# Altium PCB ip-mic-cat.PcbDoc (part 1 of 2)
Units mm, origin at the board's own origin, x right, y up, seen from the top; angles counter-clockwise.
Board outline 152.4 x 101.6 mm, 2 copper layers (Top Layer, Bottom Layer); 79 components, 63 nets, 296 pads, 99 vias.
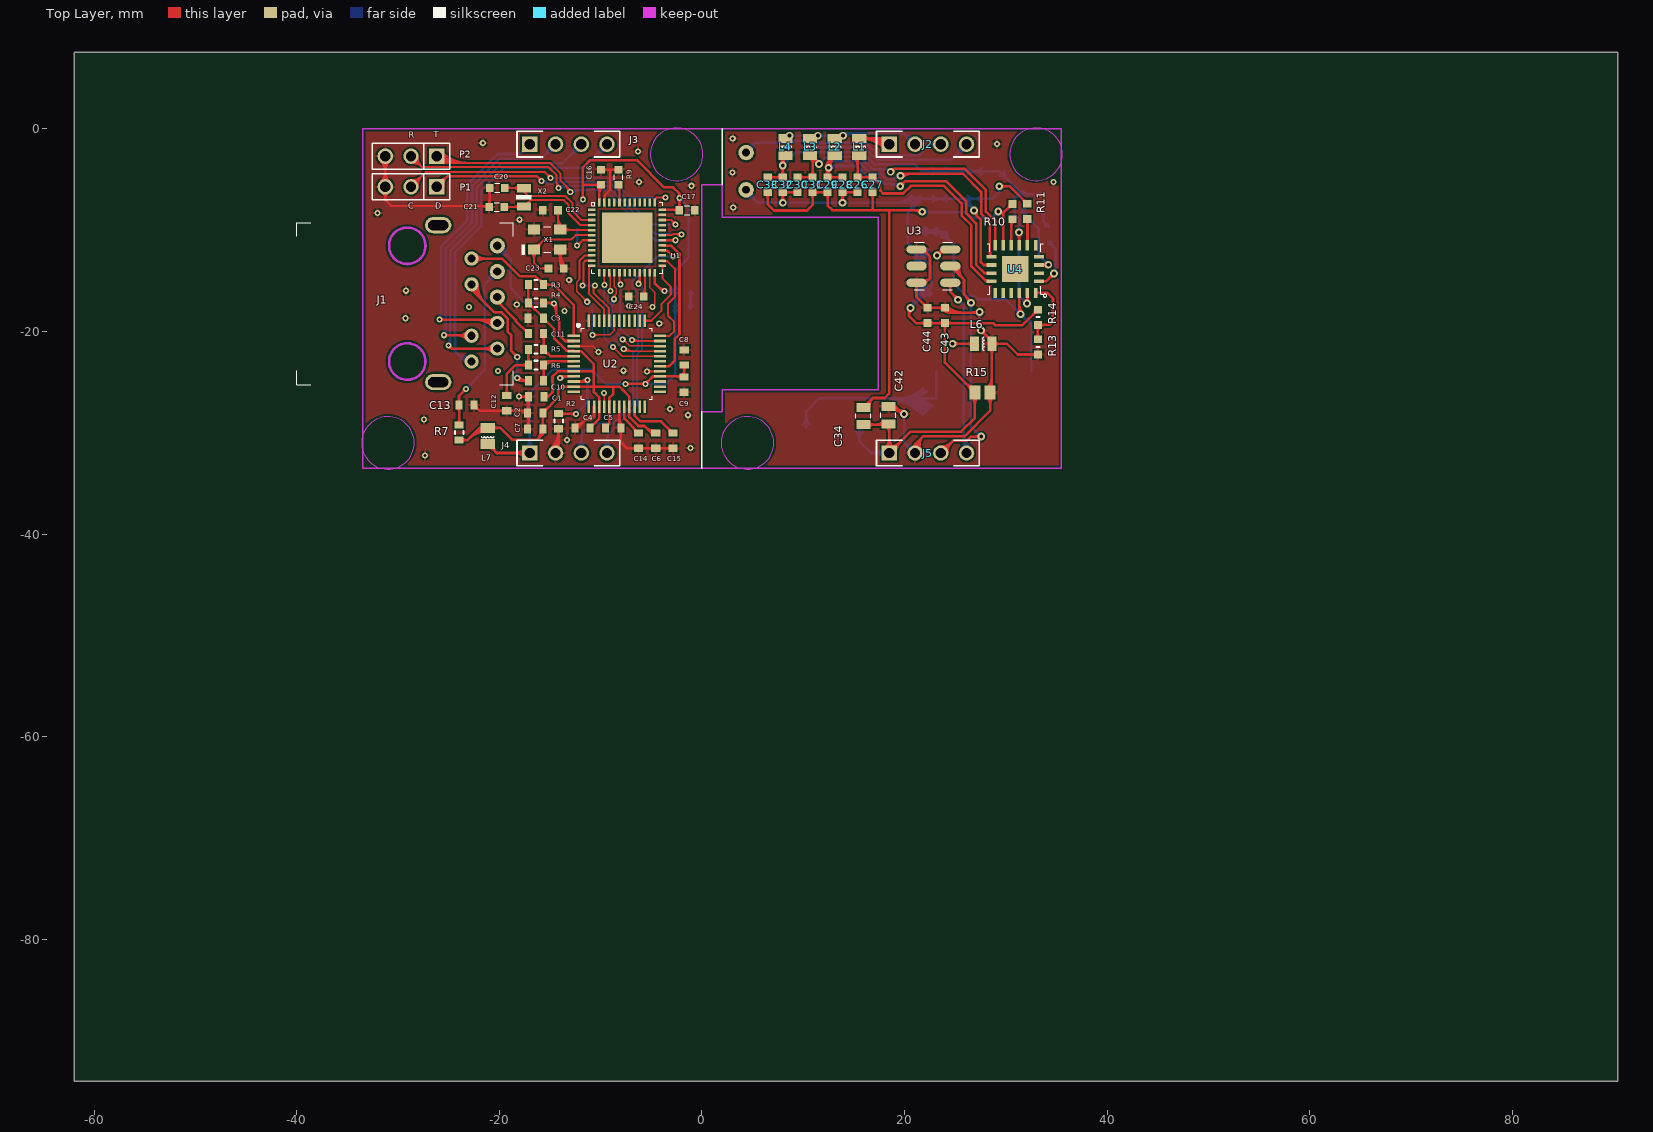
[diagram p0: Top Layer view]
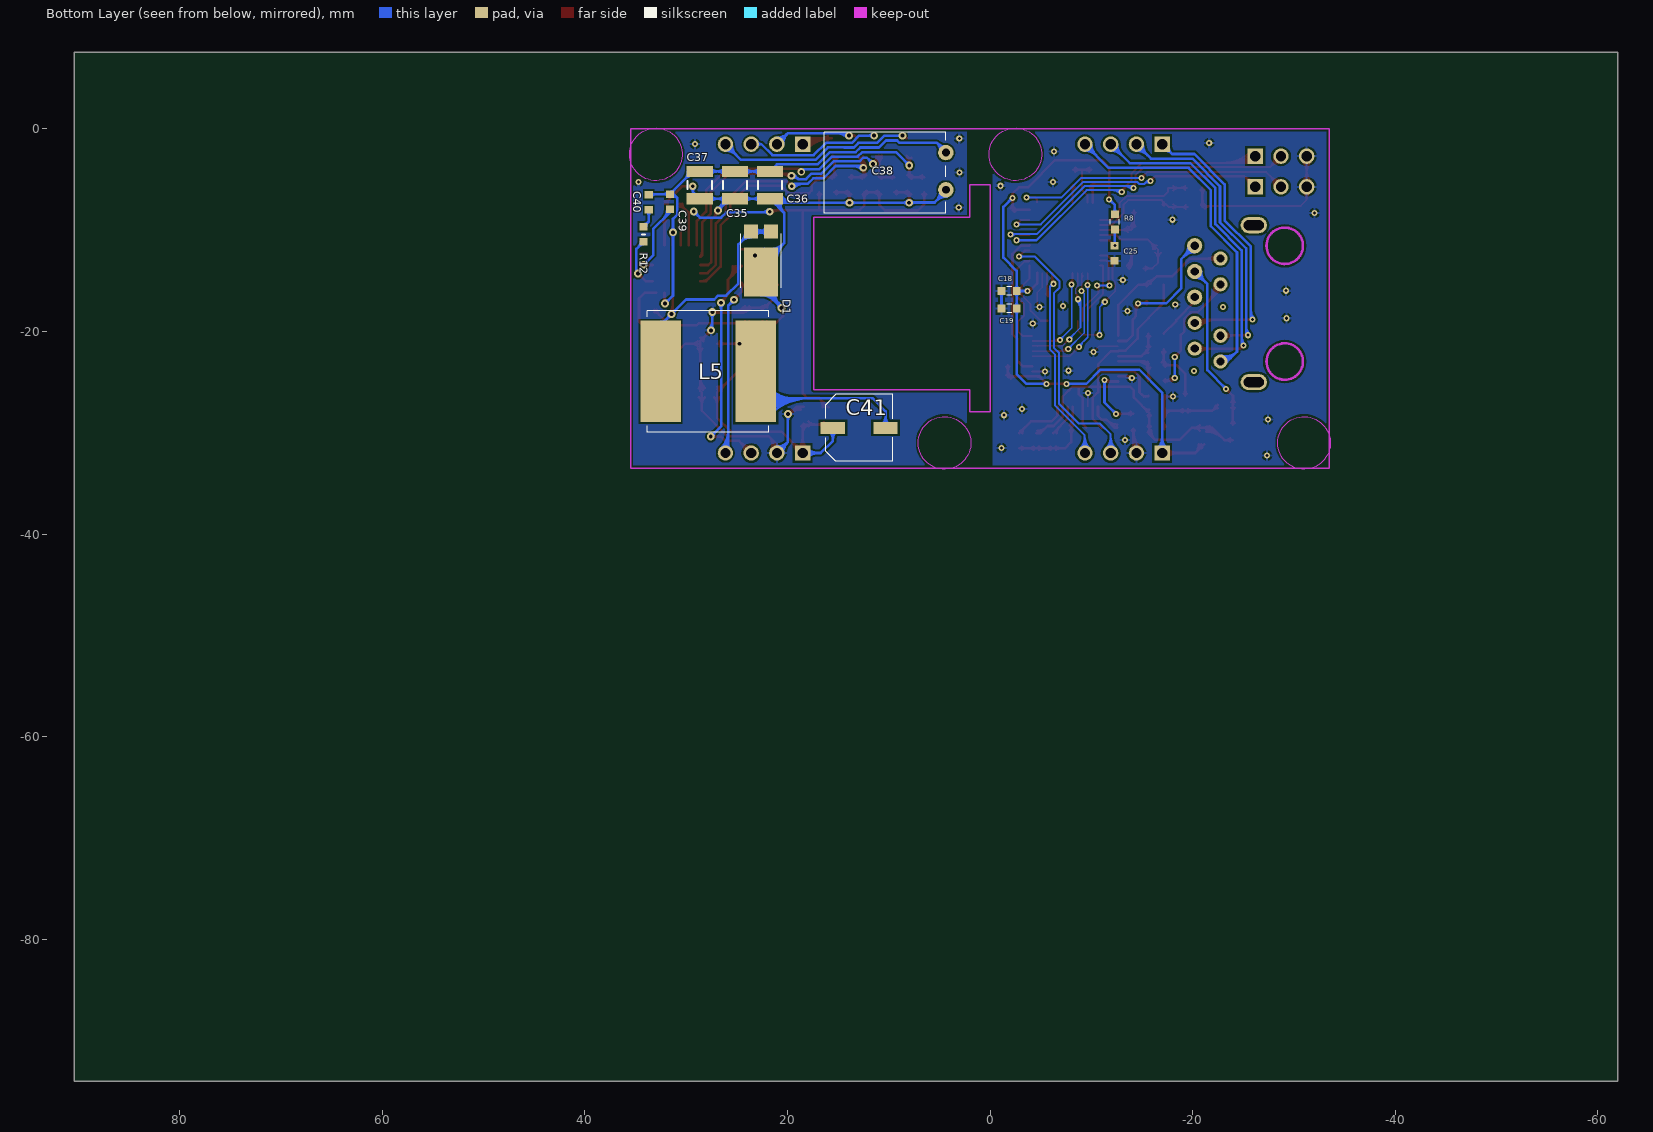
[diagram p1: Bottom Layer view, seen from below]

## Layer stack, top to bottom
Top Layer: signal copper 0.0356
Dielectric: dielectric 0.32, FR-4, Dk 4.8
Bottom Layer: signal copper 0.0356

## Board outline
-61.973,-94.031 90.427,-94.031 90.427,7.569 -61.973,7.569

## Design rules (kind name [scope] priority, off if disabled: settings)
Clearance [All] p1: gap=0.203
MinimumSolderMaskSliver [All] p1 off: minsoldermaskwidth=0.1
PolygonConnect [All] p1: connectstyle=Relief reliefconductorwidth=0.254 reliefentries=4 polygonreliefangle="90 Angle"
RoutingVias [All] p1: holewidth=0.3 width=0.6 viastyle="Through Hole" minholewidth=0.3 minwidth=0.6 maxholewidth=0.3 maxwidth=0.6
SilkscreenOverComponentPads [All] p1: minsilkscreentomaskgap=0.05
SolderMaskExpansion [All] p1: expansion=0.102
Width [All] p1: maxlimit=0.254 minlimit=0.152 preferedwidth=0.203
26 further rules are at their usual default settings.

## Components (designator, comment, footprint, x,y, rotation, side; value= is the part's Value field where it differs from the comment)
C1 "" 0603_C -16.355,-26.439 r90 top
C2 "" 0603_C -16.457,-28.039 r90 top
C3 "" 0603_C -16.406,-18.692 r90 top
C4 "" 0603_C -11.783,-29.512 r90 top
C5 "" 0603_C -8.76,-29.512 r270 top
C6 "" 0603_C -4.557,-30.782 r180 top
C7 "" 0603_C -16.457,-29.639 r90 top
C8 "" 0603_C -1.75,-22.578 r0 top
C9 "" 0603_C -1.775,-25.245 r180 top
C10 "" 0603_C -16.38,-24.864 r90 top
C11 "" 0603_C -16.38,-20.216 r90 top
C12 "" 0603_C -19.276,-27.074 r0 top
C13 "" 0603_C -23.238,-27.252 r270 top
C14 "" 0603_C -6.246,-30.782 r0 top
C15 "" 0603_C -2.868,-30.782 r0 top
C16 "" C0603 -9.98,-4.773 r0 top
C17 "" C0603 -1.471,-8.024 r270 top
C18 "" C0603 -1.877,-15.999 r90 bottom
C19 "" C0603 -1.877,-17.727 r90 bottom
C20 "" C0603 -20.216,-5.814 r90 top
C21 "" C0603 -20.267,-7.719 r90 top
C22 "" C0603 -14.958,-8.024 r90 top
C23 "" C0603 -14.399,-13.764 r270 top
C24 "" C0603 -6.474,-16.533 r90 top
C25 "" C0603 -12.291,-12.278 r0 bottom
C26 "" C0603 15.379,-5.509 r0 top
C27 "" C0603 16.859,-5.509 r180 top
C28 "" C0603 13.898,-5.509 r0 top
C29 "" C0603 12.418,-5.509 r180 top
C30 "" C0603 9.457,-5.509 r0 top
C31 "" C0603 10.937,-5.509 r180 top
C32 "" C0603 7.976,-5.509 r0 top
C33 "" C0603 6.496,-5.509 r180 top
C34 "" C0805#1 15.945,-28.344 r0 top
C35 "" C1210 25.19,-5.537 r270 bottom
C36 "" C1210 21.736,-5.537 r270 bottom
C37 "" C1210 28.67,-5.537 r270 bottom
C38 "" CAP1 4.362,-8.329 r0 bottom
C39 "" C0603 31.616,-7.188 r0 bottom
C40 "" C0603 33.699,-7.239 r0 bottom
C41 "" CAP2 12.922,-29.515 r90 bottom
C42 "" C0805#1 18.408,-28.268 r0 top
C43 "" C0603 23.996,-18.415 r0 top
C44 "" C0603 22.269,-18.415 r0 top
D1 "PDS5100" PDS5100 22.625,-14.122 r0 bottom
J1 "HR891156C" HR891156C -27.1,-17.25 r90 top locked
J2 "" CON4 26.13,-1.5 r0 top
J3 "" CON4 -9.37,-1.5 r0 top locked
J4 "" CON4 -9.37,-32 r0 top locked
J5 "" CON4 26.13,-32 r0 top
L1 "" L0805#1 15.538,-1.778 r0 top
L2 "" L0805#1 13.108,-1.778 r0 top
L3 "" L0805#1 10.678,-1.778 r0 top
L4 "" L0805#1 8.248,-1.778 r0 top
L5 "" IND12x12 33.837,-17.932 r180 bottom
L6 "FB1" L0805#1 27.781,-21.209 r90 top
L7 "HH-1M1608-121JT" L0805#2 -21.156,-30.325 r180 top
P1 "" CON3 -26.185,-5.712 r180 top
P2 "" CON3 -26.185,-2.69 r180 top
R2 "" 0603_R -14.145,-28.852 r180 top
R3 "" 0603_R -16.38,-15.364 r270 top
R4 "" 0603_R -16.38,-17.168 r270 top
R5 "" 0603_R -16.38,-21.765 r90 top
R6 "" 0603_R -16.38,-23.315 r90 top
R7 "" 0603_R -23.975,-29.969 r0 top
R8 "" C0603 -12.316,-9.179 r0 bottom
R9 "" C0603 -8.227,-4.773 r0 top
R10 "" R0603 30.651,-8.913 r180 top
R11 "" R0603 32.124,-8.887 r180 top
R12 "" R0603 34.233,-11.151 r0 bottom
R13 "" R0603 33.191,-20.775 r0 top
R14 "" R0603 33.166,-17.854 r0 top
R15 "" C0805#2 27.705,-26.035 r0 top
U1 "STM32F401CxU" UFQFPN48-7X7 -7.389,-10.742 r0 top
U2 "W5500" LQFP48-7x7 -8.405,-23.188 r0 top locked
U3 "MP45DT02-M" MP45DT02-M-1 20.974,-11.176 r0 top
U4 "SI3402B" SI3402B 33.445,-16.332 r180 top
X1 "25M" XTAL3225 -15.288,-10.919 r0 top
X2 "32.768" XTAL2012 -17.574,-6.754 r180 top

## Footprints (in the part's own frame and the unit in brackets; to place one, negate y for a bottom-side part, rotate by r counter-clockwise, add the part's x,y. Pads: shape width x height; smd on the part's side, far side on the other; paste and mask are expansions set on the pad)
0603_C [mm] "Microbit"
  rect 0.9x0.7 smd: 1(0,0.75) 2(0,-0.75)
  body extent -0.42,-0.75 0.43,0.8, height 0.45
0603_R [mm] "Microbit"
  rect 0.9x0.7 smd: 1(0,0.75) 2(0,-0.75)
  silkscreen extent -0.43,-0.15 0.43,0.15, body extent -0.42,-0.75 0.43,0.8, height 0.45
C0603 [mm] "0.8(无"
  rect 0.8x0.75 smd: 1(0,0.75) 2(0,-0.75)
C0805#1 [mm] "2.0x1.2   两"
  rect 1.4x0.9 smd: 1(0,0.85) 2(0,-0.85)
  silkscreen extent -0.74,-0.23 0.74,0.23
C0805#2 [mm] "Chip Capacitor, Body 2.0x1.3mm, IPC High Density"
  rect 1.1x1.4 smd: 1(-0.75,0) 2(0.75,0)
  body extent -1.1,-0.72 1.1,0.72, height 1.4
C1210 [mm] "Chip Capacitor, Body 3.2x2.5mm, IPC High Density"
  rect 1.1x2.6 smd: 1(-1.35,0) 2(1.35,0)
  silkscreen extent -0.4,-1.2 0.4,1.2, body extent -1.7,-1.35 1.7,1.35, height 1.3
CAP1 [mil] "µç½"
  round 60 hole 30: 1(0,-91) 2(0,-236)
  silkscreen extent 0,-315 472,0
CAP2 [mm] "表"
  rect 1.2x2.4 smd: 1(0,2.6) 2(0,-2.6)
  silkscreen extent -3.3,-3.3 3.3,3.3
CON3 [mil]
  rect 60x60 hole 40: 1(0,0)
  round 60 hole 40: 2(100,0) 3(200,0)
  silkscreen extent -50,-50 250,50
CON4 [mil] "2.54mm"
  rect 60x60 hole 40: 1(-300,0)
  round 60 hole 40: 2(-200,0) 3(-100,0) 4(0,0)
  silkscreen extent -350,-50 50,50
HR891156C [mm] "with POE ×ÊÁ"
  round 1.5 hole 0.8: 1(5.72,-6.895) 3(3.18,-6.895) 5(0.64,-6.895)
  round 1.4 hole 0.8: 2(4.45,-4.355) 4(1.91,-4.355) 7(-1.9,-6.895) 8(-3.17,-4.355) 9(-4.44,-6.895) 10(-5.71,-4.355)
  oval 1.6x2.6 hole 1 slot 2 at 90 deg: 11(-7.745,-1.057) 12(7.745,-1.057)
  Keep-Out Layer circle w0.254: c5.715,1.995 r1.8
  Keep-Out Layer circle w0.254: c-5.715,1.995 r1.8
  silkscreen extent -8,-8.48 8,12.92
IND12x12 [mm]
  rect 4x10 smd: 1(1.3,-6) 2(10.7,-6)
  silkscreen extent 0,-12 12,0
L0805#1 [mm] "2.0x1.2   两"
  rect 1.4x0.9 smd: 1(0,0.85) 2(0,-0.85)
  silkscreen extent -0.64,-0.08 0.64,0.08
L0805#2 [mm] "2.0x1.2   两"
  rect 1.4x1 smd: 1(0,0.8) 2(0,-0.8)
  silkscreen extent -0.64,0 0.64,0.16
LQFP48-7x7 [mm] "从mcu"
  rect 1.2x0.25 smd: 1(-4.25,2.75) 2(-4.25,2.25) 3(-4.25,1.75) 4(-4.25,1.25) 5(-4.25,0.75) 6(-4.25,0.25) 7(-4.25,-0.25) 8(-4.25,-0.75) 9(-4.25,-1.25) 10(-4.25,-1.75) 11(-4.25,-2.25) 12(-4.25,-2.75) 25(4.25,-2.75) 26(4.25,-2.25) 27(4.25,-1.75) 28(4.25,-1.25) 29(4.25,-0.75) 30(4.25,-0.25) 31(4.25,0.25) 32(4.25,0.75) 33(4.25,1.25) 34(4.25,1.75) 35(4.25,2.25) 36(4.25,2.75)
  rect 0.25x1.2 smd: 13(-2.75,-4.25) 14(-2.25,-4.25) 15(-1.75,-4.25) 16(-1.25,-4.25) 17(-0.75,-4.25) 18(-0.25,-4.25) 19(0.25,-4.25) 20(0.75,-4.25) 21(1.25,-4.25) 22(1.75,-4.25) 23(2.25,-4.25) 24(2.75,-4.25) 37(2.75,4.25) 38(2.25,4.25) 39(1.75,4.25) 40(1.25,4.25) 41(0.75,4.25) 42(0.25,4.25) 43(-0.25,4.25) 44(-0.75,4.25) 45(-1.25,4.25) 46(-1.75,4.25) 47(-2.25,4.25) 48(-2.75,4.25)
  silkscreen extent -3.92,-3.5 3.5,3.92
MP45DT02-M-1 [mm] "用"
  oval 2x0.8 smd: 1(0.212,-0.71) 3(0.212,-4.01) 4(3.549,-4.01) 6(3.548,-0.71)
  oval 2x0.9 smd: 2(0.212,-2.36) 5(3.549,-2.36)
  silkscreen extent 0,-4.72 3.76,0
PDS5100 [mm] "diodes.com  Schottky"
  rect 1.39x1.4 smd: 1(-0.985,-3.982) 1(0.985,-3.982)
  rect 3.36x4.86 smd: 2(0,0)
  silkscreen extent -2,-3.8 2,1.57
R0603 [mm] "Microbit"
  rect 0.8x0.75 smd: 1(0,0) 2(0,-1.5)
SI3402B [mm]
  rect 2.6x2.6 smd: 0(2.5,-2.5)
  rect 1x0.35 smd: 1(0.15,-1.3) 2(0.15,-2.1) 3(0.15,-2.9) 4(0.15,-3.7) 11(4.85,-3.7) 12(4.85,-2.9) 13(4.85,-2.1) 14(4.85,-1.3)
  rect 0.35x1 smd: 5(0.5,-4.85) 6(1.3,-4.85) 7(2.1,-4.85) 8(2.9,-4.85) 9(3.7,-4.85) 10(4.5,-4.85) 15(4.5,-0.15) 16(3.7,-0.15) 17(2.9,-0.15) 18(2.1,-0.15) 19(1.3,-0.15) 20(0.5,-0.15)
  silkscreen extent -0.59,-5 5.25,0.29
UFQFPN48-7X7 [mm]
  rect 0.75x0.25 smd: 1(-3.475,2.75) 2(-3.475,2.25) 3(-3.475,1.75) 4(-3.475,1.25) 5(-3.475,0.75) 6(-3.475,0.25) 7(-3.475,-0.25) 8(-3.475,-0.75) 9(-3.475,-1.25) 10(-3.475,-1.75) 11(-3.475,-2.25) 12(-3.475,-2.75) 25(3.475,-2.75) 26(3.475,-2.25) 27(3.475,-1.75) 28(3.475,-1.25) 29(3.475,-0.75) 30(3.475,-0.25) 31(3.475,0.25) 32(3.475,0.75) 33(3.475,1.25) 34(3.475,1.75) 35(3.475,2.25) 36(3.475,2.75)
  rect 0.25x0.75 smd: 13(-2.75,-3.475) 14(-2.25,-3.475) 15(-1.75,-3.475) 16(-1.25,-3.475) 17(-0.75,-3.475) 18(-0.25,-3.475) 19(0.25,-3.475) 20(0.75,-3.475) 21(1.25,-3.475) 22(1.75,-3.475) 23(2.25,-3.475) 24(2.75,-3.475) 37(2.75,3.475) 38(2.25,3.475) 39(1.75,3.475) 40(1.25,3.475) 41(0.75,3.475) 42(0.25,3.475) 43(-0.25,3.475) 44(-0.75,3.475) 45(-1.25,3.475) 46(-1.75,3.475) 47(-2.25,3.475) 48(-2.75,3.475)
  rect 5x5 smd paste-2.832: 49(0,0)
  silkscreen extent -3.5,-3.5 3.5,3.5
XTAL2012 [mm] "即0805"
  rect 1.4x0.8 smd: 1(0,0.9) 2(0,-0.9)
  silkscreen extent -0.74,-0.2 0.74,0.2
XTAL3225 [mm] "焊盘0"
  rect 1.2x1 smd: 1(-1.3,-1) 2(1.3,-1) 3(1.3,1) 4(-1.3,1)
  silkscreen extent -2.49,-1.48 0.35,1.25

## Part data
C1 C2 C3 C4 C5 C6 C7 C8 C9 C10 C11 C12 C13 C14 C15 C16 C17 C18 C19 C26 C27 C28 C29 C30 C31 C32 C33 C34 C35 C36 C37 C39 C40 C42 C43 C44: library part Cap
C20 C21 C22 C23 C24 C25: library part Cap, "Capacitor"
C38 C41: library part Cap2, "Capacitor"
D1: library part "D Schottky", "Schottky Diode"
J1: "with POE"
J2 J3 J4 J5: library part CON4
L1 L2 L3 L4 L5 L6: library part Ind, "Inductor"
L7: library part Ind
P1 P2: library part "Header 3", "Header, 3-Pin"
R2 R3 R4 R5 R6 R7 R10 R11 R12 R13 R14 R15: library part Res
R8 R9: library part Res3, "Resistor"
U1: "CBU CCU CDU CEU 还适用 F412C"
U3: "digital microphone"
U4: "PoE with DC-DC"
X1: library part XTAL_4pin
X2: library part XTAL_2pin

## Via types
v1: diameter 0.6, hole 0.3, Top Layer to Bottom Layer, 70 vias
v2: diameter 0.762, hole 0.381, Top Layer to Bottom Layer, 29 vias

## Nets (pads, with @x,y where several pads share a name; then routed paths per layer and width w, separated by ;. In a path a pad name is that pad's centre, name@x,y a point inside that pad or via, vN(x,y) a via of type N, cw(c..) or ccw(c..) an arc to the next point about the centre after c; other vN are vias at no path point)
3V3: C8.2 C9.2 C16.2 C17.2 C18.2 C19.2 J4.1 L7.1 R8.2 U1.24 U1.36 U1.48 U2.28 | length 106.5
  Top Layer w0.254: L7.1@-21.156,-31.125 -20.281,-32 ; L7.1@-20.956,-31.498 cw(c-20.956,-31.916) L7.1@-20.66,-31.62 ; L7.1@-20.837,-31.136 ccw(c-20.237,-31.191) L7.1@-20.663,-31.617 ; L7.1@-20.584,-31.159 ccw(c-19.537,-31.256) -20.281,-32 ; J4.1@-17.439,-32.449 ccw(c-18.523,-33.533) -18.523,-32 ccw(c-18.523,-30.467) J4.1@-17.439,-31.551 ; J4.1@-17.259,-32.269 ccw(c-17.91,-32.92) -17.91,-32 ccw(c-17.91,-31.08) J4.1@-17.259,-31.731 ; J4.1@-16.99,-32 -20.281,-32 ; v1@-11.88,-6.835 ccw(c-12.175,-6.539) -11.758,-6.539 ccw(c-11.34,-6.539) v1@-11.635,-6.835 ; v1(-11.758,-6.957) -11.758,-5.509 ; C16.2@-10.18,-5.698 ccw(c-10.603,-6.121) -10.603,-5.523 ccw(c-10.603,-4.924) C16.2@-10.18,-5.347 ; U1.48@-10.139,-7.267 -10.139,-5.682 C16.2@-9.98,-5.523 -11.744,-5.523 -11.758,-5.509 ; -10.139,-6.445 cw(c-9.082,-6.445) C16.2@-9.829,-5.698 ; v1(-7.541,-25.169) v1(-5.585,-25.169) -4.854,-24.438 U2.28@-4.155,-24.438 -1.833,-24.438 C9.2@-1.775,-24.495 ; v1@-7.419,-25.291 cw(c-7.124,-25.586) -7.124,-25.169 cw(c-7.124,-24.751) v1@-7.419,-25.046 ; v1@-5.708,-25.291 ccw(c-6.003,-25.586) -6.003,-25.169 ccw(c-6.003,-24.751) v1@-5.708,-25.046 ; v1@-5.585,-24.996 ccw(c-5.585,-24.578) -5.29,-24.873 ccw(c-4.995,-25.169) v1@-5.412,-25.169 ; -5.009,-24.593 cw(c-4.63,-24.973) U2.28@-4.63,-24.436 ; U1.24@-4.639,-14.217 -4.639,-15.27 -3.909,-15.999 v1(-3.68,-15.999) ; -4.366,-15.542 ccw(c-3.68,-14.857) v1@-3.68,-15.826 ; U1.36@-3.914,-7.992 -2.253,-7.992 C17.2@-2.221,-8.024 -2.221,-6.385 ; -2.837,-7.992 cw(c-2.837,-8.615) C17.2@-2.396,-8.174 ; -2.802,-7.992 ccw(c-2.802,-7.417) -2.396,-7.823 ccw(c-2.819,-7.4) -2.221,-7.4 ccw(c-1.622,-7.4) C17.2@-2.045,-7.823 ; -2.552,-24.438 cw(c-2.552,-25.172) C9.2@-2.033,-24.653 ; v1@-2.33,-6.952 cw(c-2.592,-7.215) -2.221,-7.215 ; v1@-2.33,-6.708 ccw(c-2.592,-6.445) -2.221,-6.445 ; -2.275,-24.438 ccw(c-2.275,-24.095) C9.2@-2.033,-24.337 ; -2.221,-7.28 cw(c-1.757,-7.28) v1@-2.085,-6.952 ; v1@-2.086,-6.707 cw(c-1.769,-6.385) -2.221,-6.385 ; C9.2@-1.933,-24.337 ccw(c-2.375,-23.895) -1.75,-23.895 ; C8.2@-1.908,-23.486 cw(c-2.288,-23.866) -1.75,-23.866 cw(c-1.212,-23.866) C8.2@-1.592,-23.486 ; C9.2@-1.75,-24.47 C8.2@-1.75,-23.328 ; -1.75,-24.018 ccw(c-1.298,-24.018) C9.2@-1.618,-24.337 ; -11.758,-5.509 -11.758,-3.782 -11.046,-3.071 -6.424,-3.071 -3.731,-5.763 -2.842,-5.763 -2.221,-6.385
  Bottom Layer w0.254: J4.1@-17.439,-31.551 ccw(c-18.523,-30.467) -16.99,-30.467 ccw(c-15.457,-30.467) J4.1@-16.541,-31.551 ; J4.1@-17.259,-31.731 ccw(c-17.91,-31.08) -16.99,-31.08 ccw(c-16.07,-31.08) J4.1@-16.721,-31.731 ; J4.1@-16.99,-32 -16.99,-26.032 -14.729,-23.772 -10.894,-23.772 -9.497,-25.169 v1(-7.541,-25.169) ; R8.2@-12.492,-8.253 ccw(c-12.915,-7.83) -12.316,-7.83 ccw(c-11.718,-7.83) R8.2@-12.141,-8.253 ; R8.2@-12.316,-8.429 -12.316,-7.516 v1(-11.758,-6.957) ; v1@-11.931,-6.957 cw(c-12.348,-6.957) -12.053,-7.252 cw(c-11.758,-7.548) v1@-11.758,-7.13 ; v1@-7.664,-25.291 ccw(c-7.959,-25.586) -7.959,-25.169 ccw(c-7.959,-24.751) v1@-7.664,-25.046 ; v1(-5.585,-25.169) -3.579,-25.169 -2.627,-24.217 C19.2@-2.627,-17.727 C18.2@-2.627,-15.999 ; v1@-5.463,-25.291 cw(c-5.168,-25.586) -5.168,-25.169 cw(c-5.168,-24.751) v1@-5.463,-25.046 ; v1(-3.68,-15.999) C18.2@-2.627,-15.999 ; v1@-3.558,-16.122 cw(c-3.263,-16.417) -3.263,-15.999 cw(c-3.263,-15.582) v1@-3.558,-15.877 ; C19.2@-2.802,-17.927 cw(c-3.226,-18.35) -2.627,-18.35 cw(c-2.028,-18.35) C19.2@-2.452,-17.927 ; C19.2@-2.802,-17.526 ccw(c-3.226,-17.103) -2.627,-17.103 ccw(c-2.028,-17.103) C19.2@-2.452,-17.526 ; C18.2@-2.802,-16.2 cw(c-3.226,-16.623) -2.627,-16.623 cw(c-2.028,-16.623) C18.2@-2.452,-16.2 ; C18.2@-2.802,-16.175 ccw(c-3.226,-16.598) -3.226,-15.999 ccw(c-3.226,-15.401) C18.2@-2.802,-15.824 ; C18.2@-2.802,-15.799 ccw(c-3.226,-15.376) -2.627,-15.376 ccw(c-2.028,-15.376) C18.2@-2.452,-15.799 ; v1@-2.207,-7.003 cw(c-2.207,-7.482) -1.869,-7.143 ; v1@-2.194,-6.817 -1.318,-7.694 -1.318,-12.697 -2.627,-14.006 C18.2@-2.627,-15.999 ; v1@-2.034,-6.83 ccw(c-1.678,-6.83) -1.93,-7.082
  other v1: -2.207,-6.83
3V3A: C1.2 C2.2 C3.2 C4.2 C5.2 C6.2 C7.2 L7.2 R3.2 R4.2 R7.2 U2.4 U2.8 U2.11 U2.15 U2.17 U2.21 | length 70.3
  Top Layer w0.254: R7.2@-23.975,-30.719 -23.15,-30.719 -21.956,-29.525 ; R7.2@-23.717,-30.877 cw(c-23.337,-31.258) -23.337,-30.719 cw(c-23.337,-30.181) R7.2@-23.717,-30.562 ; -23.017,-30.586 cw(c-21.356,-32.248) L7.2@-21.356,-29.898 ; -22.583,-30.153 cw(c-21.356,-31.38) L7.2@-21.356,-29.644 ; -22.15,-29.719 cw(c-21.356,-30.513) L7.2@-21.356,-29.39 ; L7.2@-21.69,-29.69 ccw(c-21.956,-29.821) -21.956,-29.525 ; L7.2@-21.69,-29.36 cw(c-21.956,-29.229) -21.956,-29.525 ; L7.2@-20.692,-29.789 cw(c-20.055,-30.425) -20.055,-29.525 cw(c-20.055,-28.625) L7.2@-20.692,-29.261 ; R3.2@-17.13,-15.364 R4.2@-17.13,-17.168 -15.656,-18.642 C3.2@-15.656,-18.692 -14.57,-19.778 -14.57,-20.714 -13.391,-21.893 -12.7,-21.893 U2.4@-12.655,-21.938 -11.963,-21.938 -10.665,-23.235 -10.665,-23.924 ; C7.2@-15.928,-29.763 cw(c-17.053,-29.881) -16.253,-30.681 ; -15.877,-30.304 ccw(c-16.372,-29.809) C7.2@-15.676,-29.736 ; C7.2@-15.864,-29.382 ccw(c-16.245,-29.001) -15.707,-29.001 ccw(c-15.168,-29.001) C7.2@-15.549,-29.382 ; C2.2@-15.864,-28.297 cw(c-16.245,-28.677) -15.707,-28.677 cw(c-15.168,-28.677) C2.2@-15.549,-28.297 ; C7.2@-15.822,-29.93 cw(c-15.944,-30.134) -15.707,-30.134 ; C2.2@-15.707,-27.716 ccw(c-15.707,-26.936) -15.155,-27.488 ; C1.2@-15.618,-26.367 ccw(c-15.388,-25.883) -15.009,-26.262 ; C7.2@-15.592,-29.93 ccw(c-15.469,-30.134) -15.707,-30.134 ; C2.2@-15.484,-27.939 cw(c-15.187,-27.939) C2.2@-15.397,-27.729 ; -15.187,-26.439 -14.755,-26.007 -14.755,-24.456 -14.237,-23.938 U2.8@-12.655,-23.938 -10.679,-23.938 -10.665,-23.924 ; C4.2@-11.033,-29.512 -10.155,-28.634 U2.15@-10.155,-27.438 -10.155,-26.492 -10.665,-25.982 -10.665,-25.438 ; C5.2@-9.51,-29.512 -9.155,-29.157 U2.17@-9.155,-27.438 -9.155,-26.579 -8.735,-26.159 -8.735,-25.438 ; -5.588,-29.424 ccw(c-4.657,-28.492) C6.2@-4.657,-29.809 ; -5.154,-29.857 ccw(c-4.657,-29.36) C6.2@-4.657,-30.063 ; C6.2@-4.557,-30.032 -4.979,-30.032 -5.677,-29.334 -6.275,-29.334 -7.155,-28.455 U2.21@-7.155,-27.438 -7.155,-26.444 -7.8,-25.799 -7.802,-25.799 -8.163,-25.438 -8.735,-25.438 ; -21.956,-29.525 L7.2@-21.156,-29.525 -19.898,-29.525 -18.743,-30.681 -16.253,-30.681 ; -16.253,-30.681 -15.707,-30.134 ; -15.707,-30.134 C7.2@-15.707,-29.639 C2.2@-15.707,-28.039 -14.196,-26.528 -14.196,-25.804 -13.83,-25.438 U2.11@-12.655,-25.438 -10.665,-25.438 ; -10.665,-25.438 -8.735,-25.438 ; -10.665,-25.438 -10.665,-23.924
25MHZ: U1.29 U2.30 | length 14.5
  Top Layer w0.254: U2.30@-4.155,-23.438 -3.263,-23.438 -2.868,-23.043 ; U1.29@-3.914,-11.492 -3.869,-11.537 -3.01,-11.537 -2.212,-12.335 -2.212,-20.272 -2.682,-20.742 -2.682,-22.875 -2.859,-23.052
CS: U1.14 U2.32 | length 16.4
  Top Layer w0.152: v1@-9.797,-15.268 ccw(c-10.179,-14.885) -9.639,-14.885 ccw(c-9.099,-14.885) v1@-9.481,-15.268 ; v1(-9.639,-15.426) U1.14@-9.639,-14.217 ; v1@-8.786,-21.735 cw(c-8.786,-22.275) -8.404,-21.893 cw(c-8.022,-21.511) v1@-8.562,-21.511 ; v1(-8.786,-21.511) -7.859,-22.438 U2.32@-4.155,-22.438
  Bottom Layer w0.152: v1@-9.797,-15.584 cw(c-10.179,-15.966) -9.639,-15.966 cw(c-9.099,-15.966) v1@-9.481,-15.584 ; v1(-9.639,-15.426) -9.639,-20.557 -8.786,-21.41 v1(-8.786,-21.511) ; -9.24,-20.956 cw(c-9.795,-21.511) v1@-9.01,-21.511 ; -8.994,-21.201 ccw(c-8.786,-20.992) v1@-8.786,-21.287 ; -8.98,-21.216 cw(c-9.275,-21.511) v1@-8.857,-21.511
GND: C1.1 C2.1 C3.1 C4.1 C5.1 C6.1 C7.1 C8.1 C9.1 C12.2 C13.1 C14.2 C15.2 C16.1 C17.1 C18.1 C19.1 C20.1 C21.1 C22.1 C23.1 C24.1 C25.1 J4.2 P1.3 P2.3 R2.1 R9.1 U1.23 U1.35 U1.47 U2.3 U2.9 U2.14 U2.16 U2.19 U2.29 U2.48 X1.2 X1.4 | length 110.3
  Top Layer w0.152: U2.3@-12.655,-21.438 -10.79,-21.438 v1(-10.208,-22.019) ; U2.16@-9.655,-27.438 v1(-9.655,-26.089) ; U1.23@-5.139,-14.217 -5.139,-15.659 -4.671,-16.126 -4.671,-17.371 v1(-4.874,-17.574)
  Top Layer w0.203: P1.3@-31.732,-5.245 ccw(c-32.859,-4.118) -31.265,-4.118 ccw(c-29.67,-4.118) P1.3@-30.798,-5.245 ; P2.3@-31.732,-3.157 cw(c-32.859,-4.284) -31.265,-4.284 cw(c-29.67,-4.284) P2.3@-30.798,-3.157 ; P1.3@-31.653,-6.247 cw(c-32.205,-7.008) -31.265,-7.008 ; P1.3@-31.588,-5.389 ccw(c-32.369,-4.609) -31.265,-4.609 ccw(c-30.161,-4.609) P1.3@-30.942,-5.389 ; P2.3@-31.588,-3.013 cw(c-32.369,-3.794) -31.265,-3.794 cw(c-30.161,-3.794) P2.3@-30.942,-3.013 ; P1.3@-31.533,-6.082 cw(c-31.916,-6.609) -31.265,-6.609 cw(c-30.614,-6.609) P1.3@-30.996,-6.082 ; P2.3@-31.265,-2.69 P1.3@-31.265,-5.712 -31.265,-7.008 ; P1.3@-30.877,-6.247 ccw(c-30.325,-7.008) -31.265,-7.008 ; -21.923,-7.592 cw(c-21.923,-8.6) C21.1@-21.21,-7.887 ; -21.432,-7.592 cw(c-21.432,-8.11) C21.1@-21.066,-7.744 ; -21.43,-7.592 ccw(c-21.43,-7.28) C21.1@-21.21,-7.501 ; C21.1@-21.017,-7.719 -21.144,-7.592 -30.681,-7.592 -31.265,-7.008 ; X1.2@-14.27,-12.201 cw(c-14.95,-12.881) -13.988,-12.881 cw(c-13.026,-12.881) X1.2@-13.706,-12.201 ; X1.2@-14.104,-12.254 cw(c-14.311,-12.575) -13.938,-12.494 ; -13.988,-13.242 ccw(c-13.152,-13.242) C23.1@-13.743,-13.833 ; -13.988,-12.751 ccw(c-12.661,-12.751) C23.1@-13.6,-13.69 ; X1.2@-13.988,-12.261 ccw(c-12.171,-12.261) C23.1@-13.456,-13.546 ; X1.2@-13.988,-11.919 -13.988,-13.425 C23.1@-13.649,-13.764 ; -13.905,-12.646 cw(c-13.587,-12.577) X1.2@-13.722,-12.282 ; U1.47@-9.639,-7.267 -9.639,-6.591 -9.091,-6.043 -9.091,-4.023 ; v1(-5.421,-23.938) U2.29@-4.155,-23.938 ; v1@-5.281,-24.078 cw(c-4.942,-24.417) -4.942,-23.938 cw(c-4.942,-23.459) v1@-5.281,-23.797
  Top Layer w0.254: C13.1@-22.488,-27.575 cw(c-22.488,-28.354) -21.937,-27.803 ; C13.1@-22.488,-27.252 -21.916,-27.824 C12.2@-19.276,-27.824 -17.422,-27.824 C2.1@-17.207,-28.039 -17.207,-26.54 C1.1@-17.105,-26.439 ; C13.1@-22.265,-27.352 ccw(c-21.968,-27.352) C13.1@-22.178,-27.562 ; C21.1@-21.192,-7.519 ccw(c-21.738,-6.973) -20.966,-6.973 ; C20.1@-21.141,-6.014 cw(c-21.565,-6.438) -20.966,-6.438 cw(c-20.367,-6.438) C20.1@-20.79,-6.014 ; C21.1@-20.966,-7.668 C20.1@-20.966,-5.814 ; -20.966,-7.218 ccw(c-20.541,-7.218) C21.1@-20.841,-7.519 ; C12.2@-19.534,-27.981 ccw(c-19.914,-28.362) -19.914,-27.824 ccw(c-19.914,-27.285) C12.2@-19.534,-27.666 ; C12.2@-19.018,-27.981 cw(c-18.638,-28.362) -18.638,-27.824 cw(c-18.638,-27.285) C12.2@-19.018,-27.666 ; v1(-18.082,-26.439) C1.1@-17.105,-26.439 ; -18.023,-27.824 cw(c-18.023,-28.755) C2.1@-17.364,-28.097 ; v1@-17.96,-26.561 cw(c-17.665,-26.856) -17.665,-26.439 cw(c-17.665,-26.021) v1@-17.96,-26.316 ; C7.1@-17.364,-29.382 ccw(c-17.99,-28.756) -17.105,-28.756 ; C2.1@-17.364,-28.297 cw(c-17.99,-28.923) -17.105,-28.923 ; C1.1@-17.263,-26.696 cw(c-17.643,-27.077) -17.105,-27.077 cw(c-16.567,-27.077) -16.947,-26.696 ccw(c-16.321,-27.322) -17.207,-27.322 ; C1.1@-17.263,-26.596 ccw(c-17.643,-26.977) -17.643,-26.439 ccw(c-17.643,-25.9) C1.1@-17.263,-26.281 ; C7.1@-17.207,-29.639 -17.105,-29.538 C1.1@-17.105,-26.439 ; -17.105,-27.155 cw(c-17.99,-27.155) -17.364,-27.781 ccw(c-17.745,-27.401) -17.207,-27.401 ccw(c-16.668,-27.401) C2.1@-17.049,-27.781 ; J4.2@-14.899,-31.551 ccw(c-16.719,-29.731) R2.1@-14.145,-29.731 ; J4.2@-14.719,-31.731 ccw(c-16.106,-30.344) -14.145,-30.344 ; J4.2@-14.54,-31.91 ccw(c-15.492,-30.958) -14.145,-30.958 ; J4.2@-14.45,-32 -14.145,-31.695 R2.1@-14.145,-29.602 ; R2.1@-14.303,-29.759 cw(c-14.684,-30.14) -14.145,-30.14 cw(c-13.607,-30.14) R2.1@-13.988,-29.759 ; -14.145,-31.203 ccw(c-13.653,-31.203) J4.2@-14.001,-31.551 ; v1(-13.993,-24.585) -13.846,-24.438 U2.9@-12.655,-24.438 ; v1@-13.87,-24.707 cw(c-13.22,-25.357) U2.9@-13.22,-24.438 ; C4.1@-12.533,-29.512 -12.3,-29.512 -11.52,-28.732 -11.054,-28.732 -10.655,-28.333 U2.14@-10.655,-27.438 ; C4.1@-12.533,-29.443 ccw(c-12.533,-28.713) -12.017,-29.229 ; C4.1@-12.533,-29.189 ccw(c-12.533,-27.846) -11.583,-28.796 ; C16.1@-9.98,-4.023 -9.091,-4.023 R9.1@-8.227,-4.023 ; C16.1@-9.779,-4.198 cw(c-9.356,-4.621) -9.356,-4.023 cw(c-9.356,-3.424) C16.1@-9.779,-3.847 ; R9.1@-8.427,-4.198 ccw(c-8.851,-4.621) -8.851,-4.023 ccw(c-8.851,-3.424) R9.1@-8.427,-3.847 ; C5.1@-8.168,-29.77 cw(c-8.549,-30.151) -8.01,-30.151 cw(c-7.472,-30.151) C5.1@-7.853,-29.77 ; -8.155,-28.525 ccw(c-7.123,-28.525) C5.1@-7.853,-29.255 ; U2.19@-8.155,-27.438 -8.155,-29.368 C5.1@-8.01,-29.512 -8.01,-30.923 -7.401,-31.532 C14.2@-6.246,-31.532 C6.1@-4.557,-31.532 C15.2@-2.868,-31.532 ; C14.2@-6.503,-31.69 ccw(c-6.884,-32.071) -6.884,-31.532 ccw(c-6.884,-30.994) C14.2@-6.503,-31.375 ; C14.2@-5.988,-31.69 cw(c-5.607,-32.071) -5.607,-31.532 cw(c-5.607,-30.994) C14.2@-5.988,-31.375 ; C6.1@-4.814,-31.69 ccw(c-5.195,-32.071) -5.195,-31.532 ccw(c-5.195,-30.994) C6.1@-4.814,-31.375 ; C6.1@-4.299,-31.69 cw(c-3.918,-32.071) -3.918,-31.532 cw(c-3.918,-30.994) C6.1@-4.299,-31.375 ; C15.2@-3.125,-31.69 ccw(c-3.506,-32.071) -3.506,-31.532 ccw(c-3.506,-30.994) C15.2@-3.125,-31.375
  Bottom Layer w0.254: v1(-13.993,-24.585) v1@-13.993,-24.483 ; C19.1@-1.302,-17.526 ccw(c-1.726,-17.103) -1.127,-17.103 ccw(c-0.528,-17.103) C19.1@-0.952,-17.526 ; C18.1@-1.302,-16.2 cw(c-1.726,-16.623) -1.127,-16.623 cw(c-0.528,-16.623) C18.1@-0.952,-16.2 ; C19.1@-1.127,-17.727 C18.1@-1.127,-15.999
  other v1: -27.353,-32.255 -1.14,-31.519 -13.307,-30.706 -27.455,-28.699 -1.369,-28.268 -3.172,-27.633 -7.744,-23.873 -4.214,-19.225 -29.258,-18.692 -13.561,-17.955 -7.186,-17.473 -18.285,-17.32 -29.207,-15.974 -13.104,-14.907 -18.031,-8.964 -32.027,-8.303 -1.013,-5.611 -6.195,-5.255 -6.297,-2.207 -21.638,-1.394
I2S2_CK: J4.4 U1.21 | length 25
  Top Layer w0.203: v1@-6.386,-15.148 ccw(c-6.983,-14.551) U1.21@-6.139,-14.551 ; v1(-6.246,-15.288) -6.139,-15.181 U1.21@-6.139,-14.217
  Bottom Layer w0.203: J4.4@-9.837,-31.533 ccw(c-11.026,-30.344) -9.345,-30.344 ; J4.4@-9.693,-31.677 ccw(c-10.535,-30.835) -9.345,-30.835 ; J4.4@-9.37,-32 -9.345,-31.975 -9.345,-30.239 -6.399,-27.293 -6.399,-22.259 -5.895,-21.756 -5.895,-15.588 ; -9.345,-30.958 ccw(c-8.328,-30.958) J4.4@-9.047,-31.677 ; -9.345,-30.467 ccw(c-7.837,-30.467) J4.4@-8.903,-31.533 ; v1(-6.246,-15.288) -6.195,-15.288 -5.895,-15.588 ; v1@-6.215,-15.484 cw(c-6.157,-15.849) -5.895,-15.588 ; v1@-6.047,-15.288 ccw(c-5.691,-15.288) -5.943,-15.54
I2S2_SD: J4.3 U1.28 | length 33.3
  Top Layer w0.203: U1.28@-3.914,-11.992 -3.446,-11.992 v1(-2.842,-12.596) ; U1.28@-3.664,-12.015 cw(c-3.664,-12.596) -3.253,-12.185 ; v1@-3.041,-12.596 ccw(c-3.52,-12.596) -3.181,-12.257 ccw(c-2.842,-11.918) v1@-2.842,-12.397
  Bottom Layer w0.203: J4.3@-12.377,-31.533 ccw(c-13.504,-30.406) -11.91,-30.406 ccw(c-10.316,-30.406) J4.3@-11.443,-31.533 ; J4.3@-12.233,-31.677 ccw(c-13.014,-30.896) -11.91,-30.896 ccw(c-10.806,-30.896) J4.3@-11.587,-31.677 ; J4.3@-11.91,-32 -11.91,-30.147 -10.843,-29.08 -8.76,-29.08 -6.805,-27.125 -6.805,-22.091 -6.302,-21.587 -6.302,-16.223 -6.85,-15.674 -6.85,-15.038 -4.408,-12.596 v1(-2.842,-12.596) ; v1@-2.982,-12.736 ccw(c-3.321,-13.075) -3.321,-12.596 ccw(c-3.321,-12.117) v1@-2.982,-12.456
INT: U1.26 U2.36 | length 9.9
  Top Layer w0.203: U2.36@-4.155,-20.438 -3.205,-20.438 -2.741,-19.974 -2.741,-19.047 -3.35,-18.438 -3.35,-17.269 -2.67,-16.589 -2.67,-13.805 -3.413,-13.062 -3.843,-13.062 U1.26@-3.914,-12.992
MISO: U1.16 U2.34 | length 16.6
  Top Layer w0.152: v1@-8.767,-16.604 ccw(c-8.816,-16.482) -8.684,-16.482 ; v1(-8.684,-16.812) -8.684,-16.482 ; U1.16@-8.639,-14.217 -8.639,-15.581 -8.461,-15.759 -8.461,-16.258 ; v1@-8.625,-16.772 cw(c-8.377,-16.601) -8.59,-16.388 ; v1@-8.601,-16.604 cw(c-8.553,-16.482) -8.684,-16.482 ; v1@-8.5,-16.685 cw(c-8.224,-16.495) -8.461,-16.258 ; v1(-7.821,-20.775) -7.77,-20.775 -7.485,-21.059 ; v1@-7.758,-20.989 cw(c-7.68,-21.254) -7.485,-21.059 ; v1@-7.597,-20.78 ccw(c-7.216,-20.79) -7.485,-21.059 ; -4.827,-21.405 cw(c-4.827,-21.635) U2.34@-4.664,-21.472 ; U2.34@-4.155,-21.438 -4.188,-21.405 -7.146,-21.405 -7.485,-21.065 -7.485,-21.059 ; -8.684,-16.482 -8.461,-16.258
  Bottom Layer w0.152: -8.928,-17.941 cw(c-7.555,-17.941) v1@-8.526,-16.97 ; -8.928,-17.573 cw(c-7.923,-17.573) v1@-8.634,-16.863 ; -8.928,-17.205 cw(c-8.291,-17.205) v1@-8.741,-16.755 ; v1(-8.684,-16.812) -8.786,-16.711 -8.928,-16.853 -8.928,-19.616 -7.821,-20.724 v1(-7.821,-20.775) ; -8.239,-20.306 cw(c-8.707,-20.775) v1@-8.044,-20.775 ; -8.116,-20.428 ccw(c-7.821,-20.133) v1@-7.821,-20.551
MOSI: U1.17 U2.35 | length 14
  Top Layer w0.152: v1@-8.207,-15.181 ccw(c-8.373,-15.015) -8.139,-15.015 ; -8.139,-14.95 ccw(c-7.661,-14.95) v1@-7.999,-15.289 ; U1.17@-8.139,-14.582 ccw(c-7.293,-14.582) v1@-7.891,-15.181 ; U1.17@-8.139,-14.217 -8.139,-15.249 v1(-8.049,-15.339) ; v1(-6.906,-20.825) -6.794,-20.938 U2.35@-4.155,-20.938 ; v1@-6.856,-20.775 ccw(c-6.463,-20.382) -6.463,-20.938 ; v1@-6.748,-20.667 ccw(c-6.095,-20.014) -6.095,-20.938
  Bottom Layer w0.152: v1@-8.207,-15.497 cw(c-8.528,-15.818) -8.075,-15.818 ; -8.075,-15.941 cw(c-7.448,-15.941) v1@-7.891,-15.497 ; v1(-8.049,-15.339) -8.075,-15.339 -8.075,-19.657 v1(-6.906,-20.825) ; v1@-7.13,-20.825 ccw(c-7.67,-20.825) -7.288,-20.443 ccw(c-6.906,-20.061) v1@-6.906,-20.602
NetC10_1: C10.1 J1.4 | length 22.6
  Top Layer w0.254: J1.4@-22.745,-15.34 -22.745,-15.858 -20.483,-18.12 -19.778,-18.12 -19.175,-18.723 -19.175,-19.582 -19.181,-19.588 -19.181,-20.006 -18.844,-20.343 -18.844,-21.892 v1(-18.235,-22.502) ; J1.4@-22.68,-15.34 ccw(c-21.273,-15.34) -22.268,-16.335 ; J1.4@-22.426,-15.34 ccw(c-20.406,-15.34) -21.834,-16.769 ; J1.4@-22.172,-15.34 ccw(c-19.539,-15.34) -21.401,-17.202 ; v1@-18.408,-22.502 ccw(c-18.825,-22.502) -18.53,-22.206 ccw(c-18.235,-21.911) v1@-18.235,-22.329 ; v1@-18.292,-24.642 ccw(c-17.756,-24.106) -17.756,-24.864 ; v1(-18.235,-24.585) -17.955,-24.864 ; v1@-18.228,-24.757 cw(c-18.213,-25.122) -17.955,-24.864 ; v1@-18.112,-24.462 ccw(c-17.142,-23.492) C10.1@-17.142,-24.864 ; v1@-18.062,-24.592 ccw(c-17.697,-24.606) -17.955,-24.864 ; C10.1@-17.288,-25.022 ccw(c-17.669,-25.402) -17.669,-24.864 ccw(c-17.669,-24.326) C10.1@-17.288,-24.706 ; C10.1@-17.13,-24.864 -17.955,-24.864
  Bottom Layer w0.254: v1@-18.357,-24.462 ccw(c-18.652,-24.167) -18.235,-24.167 ccw(c-17.817,-24.167) v1@-18.112,-24.462 ; v1@-18.357,-22.624 cw(c-18.652,-22.919) -18.235,-22.919 cw(c-17.817,-22.919) v1@-18.112,-22.624 ; v1(-18.235,-24.585) v1(-18.235,-22.502)
NetC11_1: C11.1 J1.5 | length 4.9
  Top Layer w0.254: J1.5@-20.205,-16.61 -20.205,-17.047 -18.387,-18.865 -18.387,-18.959 C11.1@-17.13,-20.216
NetC12_1: C12.1 R5.1 R6.1 | length 9.6
  Top Layer w0.254: C12.1@-19.434,-26.166 ccw(c-19.814,-25.785) -19.276,-25.785 ccw(c-18.738,-25.785) C12.1@-19.118,-26.166 ; C12.1@-19.276,-26.324 -19.276,-24.204 -18.387,-23.315 R6.1@-17.13,-23.315 R5.1@-17.13,-21.765 ; R6.1@-17.288,-23.472 ccw(c-17.669,-23.853) -17.669,-23.315 ccw(c-17.669,-22.776) R6.1@-17.288,-23.157 ; R6.1@-17.288,-23.057 ccw(c-17.669,-22.676) -17.13,-22.676 ccw(c-16.592,-22.676) R6.1@-16.973,-23.057 ; R5.1@-17.288,-22.023 cw(c-17.669,-22.404) -17.13,-22.404 cw(c-16.592,-22.404) R5.1@-16.973,-22.023
NetC13_2: C13.2 J1.3 R7.1 | length 24.3
  Top Layer w0.254: C13.2@-24.146,-27.509 cw(c-24.559,-27.922) -23.975,-27.922 ; C13.2@-24.146,-26.994 ccw(c-24.527,-26.613) -23.988,-26.613 ccw(c-23.45,-26.613) C13.2@-23.831,-26.994 ; R7.1@-24.133,-29.062 ccw(c-24.513,-28.681) -23.975,-28.681 ccw(c-23.437,-28.681) R7.1@-23.817,-29.062 ; R7.1@-23.975,-29.219 -23.975,-27.265 C13.2@-23.988,-27.252 -23.988,-26.351 v1(-23.315,-25.677) ; -23.975,-27.858 cw(c-23.482,-27.858) C13.2@-23.831,-27.509 ; v1@-23.488,-25.677 cw(c-23.905,-25.677) -23.61,-25.972 cw(c-23.315,-26.267) v1@-23.315,-25.85
  Bottom Layer w0.254: v1(-23.315,-25.677) -21.46,-23.823 -21.46,-15.325 J1.3@-20.205,-14.07 ; v1@-23.315,-25.504 ccw(c-23.315,-25.086) -23.019,-25.381 ccw(c-22.724,-25.677) v1@-23.142,-25.677 ; J1.3@-20.828,-14.07 cw(c-22.332,-14.07) -21.269,-15.134 cw(c-20.205,-16.197) J1.3@-20.205,-14.693 ; J1.3@-20.574,-14.07 cw(c-21.465,-14.07) -20.835,-14.7 cw(c-20.205,-15.33) J1.3@-20.205,-14.439
NetC14_1: C14.1 U2.20 | length 3.8
  Top Layer w0.254: U2.20@-7.655,-27.438 -7.655,-28.601 -6.246,-30.01 C14.1@-6.246,-30.032 ; -6.813,-29.443 cw(c-7.402,-30.032) C14.1@-6.569,-30.032
NetC15_1: C15.1 U2.22 | length 6.2
  Top Layer w0.254: U2.22@-6.655,-27.438 -6.655,-28.29 -6.068,-28.877 -4.023,-28.877 C15.1@-2.868,-30.032 ; -3.419,-29.481 cw(c-3.97,-30.032) C15.1@-3.191,-30.032 ; C15.1@-3.178,-29.722 ccw(c-2.968,-29.512) C15.1@-2.968,-29.809
NetC20_2: C20.2 U1.3 X2.2 | length 12.7
  Top Layer w0.203: C20.2@-19.466,-5.814 X2.2@-17.614,-5.814 ; C20.2@-19.272,-6.007 cw(c-18.806,-6.474) -18.806,-5.814 cw(c-18.806,-5.154) C20.2@-19.272,-5.621 ; -18.691,-5.814 cw(c-18.691,-6.67) X2.2@-18.085,-6.065 ; -18.499,-5.814 ccw(c-18.499,-5.229) X2.2@-18.085,-5.643 ; X2.2@-17.574,-5.854 -17.574,-6.175 -17.122,-6.627 -13.469,-6.627 -12.767,-7.329 -12.767,-8.142 -11.917,-8.992 U1.3@-10.864,-8.992
NetC21_2: C21.2 U1.4 X2.1 | length 13.4
  Top Layer w0.203: C21.2@-19.517,-7.719 X2.1@-17.639,-7.719 ; C21.2@-19.323,-7.912 cw(c-18.857,-8.379) -18.857,-7.719 cw(c-18.857,-7.059) C21.2@-19.323,-7.526 ; -18.752,-7.719 ccw(c-18.752,-6.776) X2.1@-18.085,-7.443 ; -18.437,-7.719 cw(c-18.437,-8.217) X2.1@-18.085,-7.865 ; X2.1@-17.574,-7.654 -16.954,-7.033 ; X2.1@-17.192,-7.606 cw(c-16.915,-7.446) -17.141,-7.221 ; X2.1@-17.016,-7.505 cw(c-16.677,-7.309) -16.954,-7.033 ; U1.4@-10.864,-9.492 -11.992,-9.492 -13.173,-8.31 -13.173,-7.498 -13.637,-7.033 -16.954,-7.033
NetC22_2: C22.2 U1.5 X1.3 | length 10.5
  Top Layer w0.203: C22.2@-14.401,-8.242 cw(c-14.868,-8.709) -14.208,-8.709 cw(c-13.548,-8.709) C22.2@-14.015,-8.242 ; X1.3@-14.37,-9.638 ccw(c-14.761,-9.247) -14.208,-9.247 ; -14.208,-9.159 ccw(c-13.328,-9.159) X1.3@-13.95,-9.781 ; -14.208,-8.668 ccw(c-12.837,-8.668) X1.3@-13.806,-9.638 ; C22.2@-14.208,-8.024 -14.208,-9.7 X1.3@-13.988,-9.919 -13.916,-9.992 U1.5@-10.864,-9.992 ; X1.3@-13.75,-9.781 ccw(c-13.243,-9.274) -13.243,-9.992 ; X1.3@-13.606,-10.201 cw(c-13.101,-10.707) -13.101,-9.992 ; X1.3@-13.606,-9.638 ccw(c-12.752,-8.783) -12.752,-9.992
NetC23_2: C23.2 U1.6 X1.1 | length 13.9
  Top Layer w0.203: X1.1@-16.87,-12.201 cw(c-17.55,-12.881) -16.588,-12.881 cw(c-15.626,-12.881) X1.1@-16.306,-12.201 ; X1.1@-16.488,-11.521 ccw(c-16.488,-10.801) -15.979,-11.31 ; X1.1@-16.293,-11.919 cw(c-15.58,-11.919) -16.084,-11.415 ; X1.1@-16.09,-11.919 cw(c-14.887,-11.919) -15.737,-11.069 ; C23.2@-15.343,-13.958 ccw(c-15.809,-14.424) -15.809,-13.764 ccw(c-15.809,-13.104) C23.2@-15.343,-13.571 ; C23.2@-15.149,-13.764 -16.025,-13.764 -16.588,-13.201 X1.1@-16.588,-11.919 -15.588,-10.919 -12.901,-10.919 -12.473,-10.492 U1.6@-10.864,-10.492
NetC24_2: C24.2 U1.22 | length 3.8
  Top Layer w0.203: C24.2@-5.918,-16.314 ccw(c-6.591,-15.641) -5.639,-15.641 ; C24.2@-5.774,-16.458 ccw(c-6.101,-16.132) -5.639,-16.132 ; C24.2@-5.724,-16.533 -5.639,-16.447 U1.22@-5.639,-14.217 ; -5.639,-16.054 ccw(c-5.271,-16.054) C24.2@-5.531,-16.314
NetC25_2: C25.2 R8.1 U1.7 | length 4
  Top Layer w0.203: v1(-12.316,-11.529) -11.779,-10.992 U1.7@-10.864,-10.992 ; v1@-12.316,-11.331 ccw(c-12.316,-10.852) -11.978,-11.19 ccw(c-11.639,-11.529) v1@-12.118,-11.529
  Bottom Layer w0.254: C25.2@-12.316,-11.502 R8.1@-12.316,-9.929
NetC26_1: C26.1 C27.2 L1.2 U4.14 | length 29.2
  Top Layer w0.254: L1.2@15.06,-2.856 cw(c14.29,-3.626) 15.379,-3.626 ; C26.1@15.203,-4.584 ccw(c14.78,-4.16) 15.379,-4.16 ccw(c15.977,-4.16) C26.1@15.554,-4.584 ; 15.379,-3.19 cw(c15.85,-3.19) L1.2@15.517,-2.856 ; L1.2@15.538,-2.628 15.379,-2.788 C26.1@15.379,-4.759 C27.2@16.859,-4.759 17.621,-5.521 17.621,-6.093 17.901,-6.373 19.871,-6.373 20.633,-5.611 23.895,-5.611 25.648,-7.364 25.648,-8.543 26.613,-9.509 26.613,-13.598 28.047,-15.032 U4.14@28.595,-15.032 ; C26.1@15.579,-4.935 cw(c16.002,-5.358) 16.002,-4.759 cw(c16.002,-4.16) C26.1@15.579,-4.584 ; C27.2@16.659,-4.935 ccw(c16.235,-5.358) 16.235,-4.759 ccw(c16.235,-4.16) C27.2@16.659,-4.584 ; C27.2@16.884,-5.007 cw(c16.884,-5.546) 17.265,-5.165 ; C27.2@17.132,-4.759 ccw(c17.791,-4.759) 17.325,-5.225 ; 27.807,-14.793 ccw(c28.27,-14.33) U4.14@28.27,-14.984